# EAGLE board Circuit 2 using 555 Timer (EAGLE 5.06)
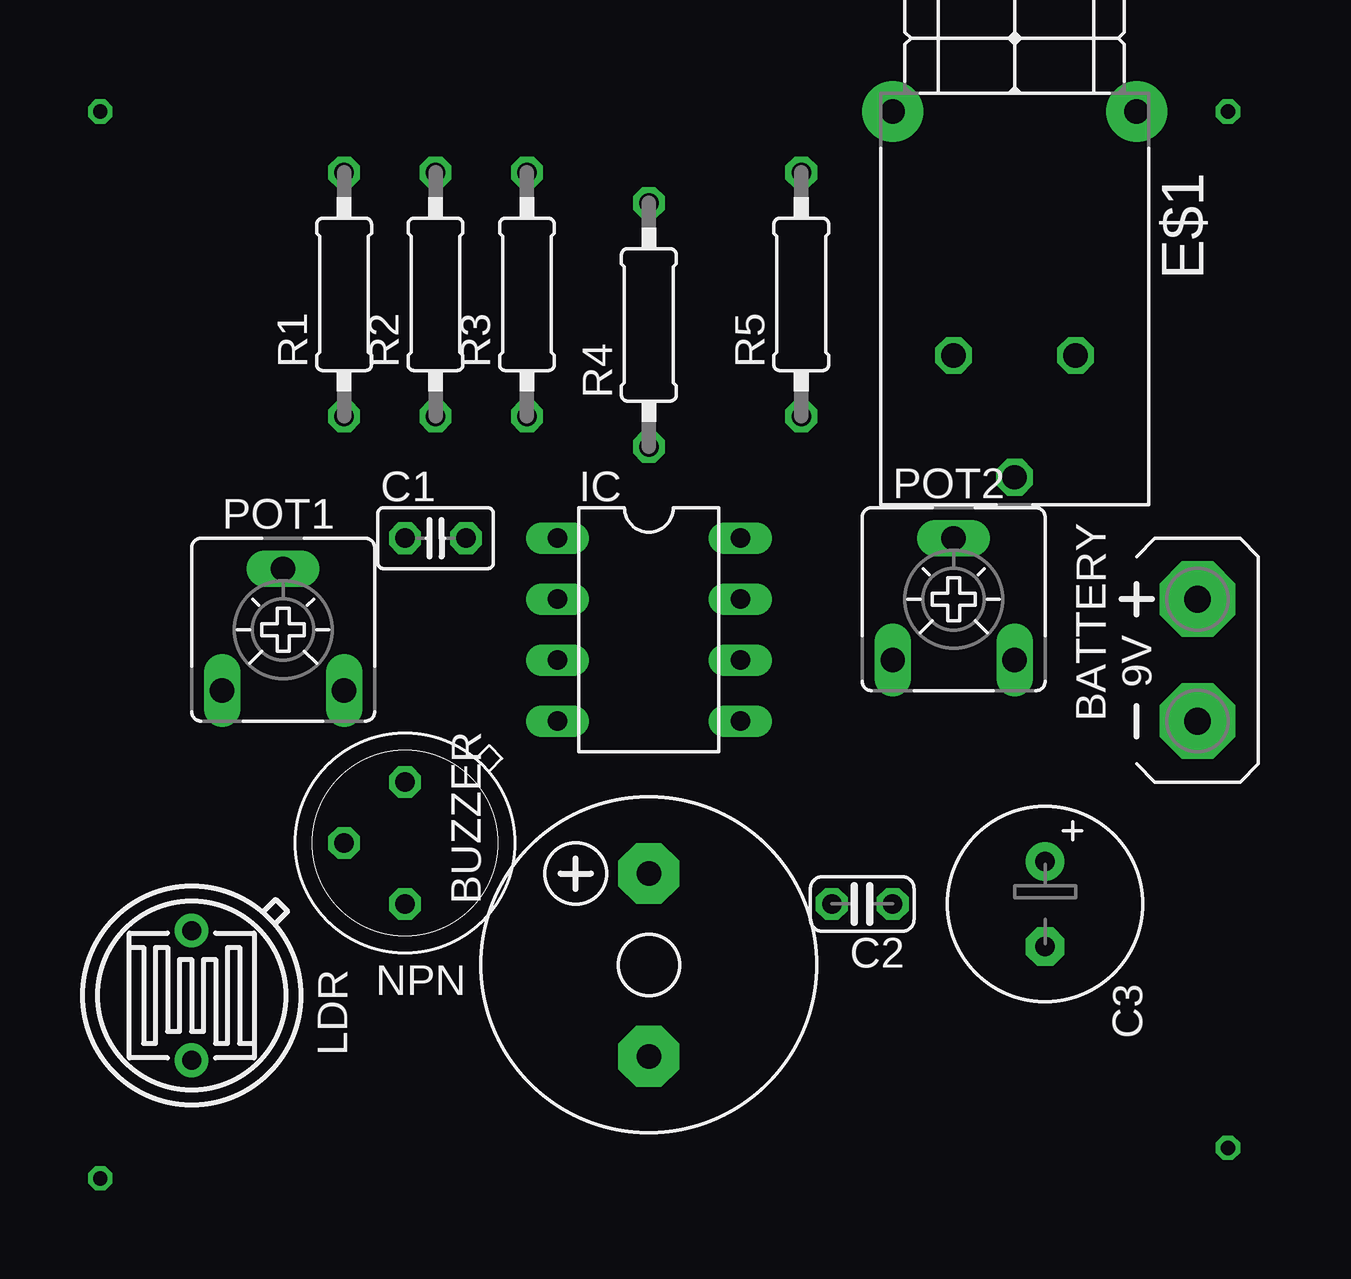
[diagram p0: board, top side]
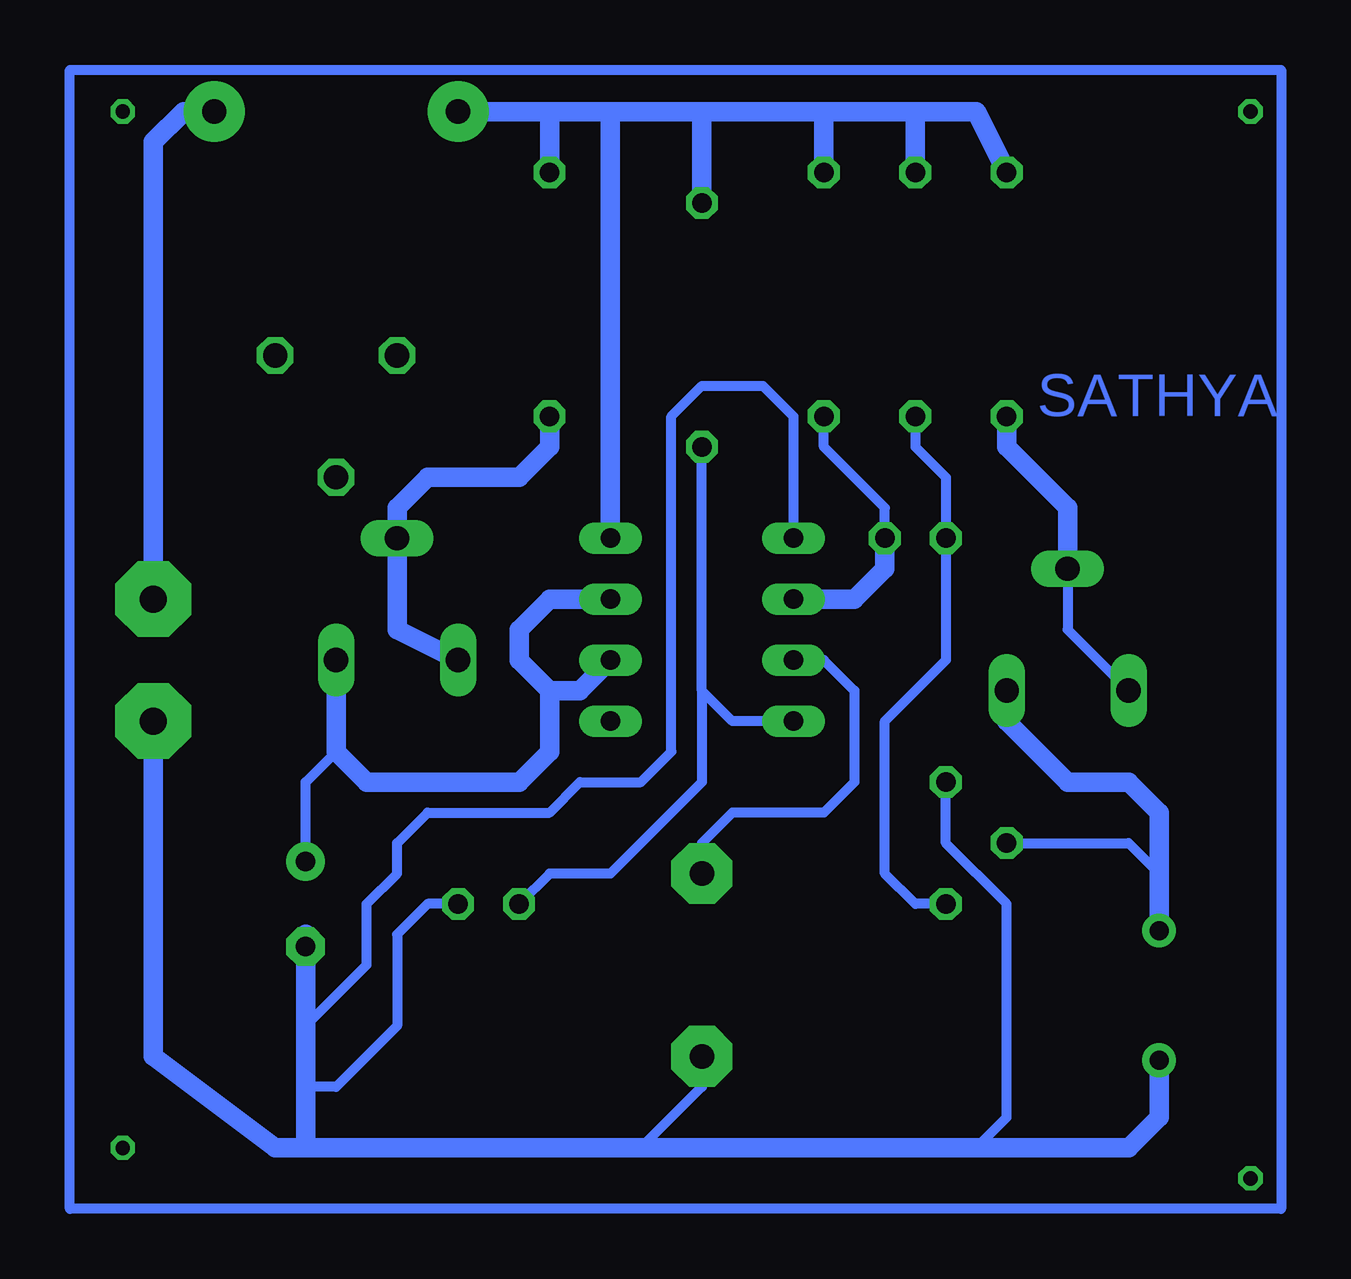
[diagram p1: board, bottom side, seen from below]

No outline drawn. Coordinates in mm, seen from the top.
Copper layers (1*16): Top 0.035mm / dielectric 1.5mm / Bottom 0.035mm
Design rules "default": minimum track width 10mil, minimum drill 24mil, track to track 8mil, track to pad 8mil, pad to pad 8mil, via to via 8mil, smd to smd 8mil, copper to edge 40mil, drill to drill 8mil, minimum pad ring 10mil, minimum via ring 8mil, stop-mask expansion 4mil, vias tented up to drill 0mil, thermal gap 10mil

## Footprints (pad centres in the part's own frame; a part is rotated, then mirrored left to right if it is on the bottom)
AB9V = drill 1.118 pad 3.15 octagon: + 0,2.54; - 0,-2.54
F/CM12P = drill 1.016 pad 2.54 octagon: + 3.81,0; - -3.81,0
C025-025X050 = drill 0.813 octagon: 1 -1.27,0; 2 1.27,0
C025-024X044 = drill 0.813 octagon: 1 -1.27,0; 2 1.27,0
E3,5-8 = drill 0.813 pad 1.6 round: + -1.778,0 | drill 0.813 pad 1.6 octagon: - 1.778,0
316-917 = drill 1.016 octagon: 1 10.16,2.54; 2 15.24,0; 3 10.16,-2.54 | drill 1.016 pad 2.54 round: B 0,-5.08; B1 0,5.08
DIL08 = drill 0.813 long: 1 -3.81,-3.81; 2 -1.27,-3.81; 3 1.27,-3.81; 4 3.81,-3.81; 5 3.81,3.81; 6 1.27,3.81; 7 -1.27,3.81; 8 -3.81,3.81
TO-5_V10 = drill 0.8 pad 1.4 round: 1 -2.7,0; 2 2.7,0
TO5 = drill 0.813 octagon: 1 0,-2.54; 2 2.54,0; 3 0,2.54
CA6V = drill 1.016 long: A -2.54,-2.54; E 2.54,-2.54; S 0,2.54
0207/10 = drill 0.813 octagon: 1 -5.08,0; 2 5.08,0

## Placement (x,y rotation side)
BATTERY  [AB9V]  68.58,24.13 0 top
BUZZER  [F/CM12P]  45.72,11.43 90 top
C1  0.1uF  [C025-025X050]  36.83,29.21 0 top
C2  0.01uF  [C025-024X044]  54.61,13.97 180 top
C3  10uF  [E3,5-8]  62.23,13.97 270 top
E$1  [316-917]  60.96,46.99 270 top
IC  555  [DIL08]  45.72,25.4 270 top
LDR  [TO-5_V10]  26.67,10.16 90 top
NPN  [TO5]  35.56,16.51 180 top
POT1  100K  [CA6V]  30.48,25.4 0 top
POT2  1M  [CA6V]  58.42,26.67 0 top
R1  10k  [0207/10]  33.02,39.37 90 top
R2  1M  [0207/10]  36.83,39.37 90 top
R3  1M  [0207/10]  40.64,39.37 90 top
R4  1M  [0207/10]  45.72,38.1 90 top
R5  47K  [0207/10]  52.07,39.37 90 top

## Library data of the parts
BATTERY = battery
BUZZER = buzzer
C1-C3 R1-R5 = rcl
E$1 = switch
IC = ic-package
LDR = photo-elements
NPN = transistor
POT1 POT2 = pot

## Nets
POT2: POT2.A POT2.S R5.1
S$2: E$1.B IC.8 R1.2 R2.2 R3.2 R4.2 R5.2
S$3: BUZZER.+ IC.3
S$4: BATTERY.+ E$1.B1
S$6: C1.1 NPN.3 R2.1
S$8: POT1.A POT1.S R1.1
S$9: C2.2 IC.4 R4.1
S$11: C1.2 IC.2 R3.1
S$12: IC.6 IC.7 POT2.E
S$16: NPN.2 POT1.E
S$17: BATTERY.- BUZZER.- C2.1 IC.1 NPN.1

## Tracks (layer width: path | path; a pad name or v marks a point on that pad's centre or on a via)
POT2
  Bottom 0.813: 58.42,27.94 58.42,25.4 POT2.A | 58.42,27.94 POT2.S | R5.1 52.07,33.02 53.34,31.75 57.15,31.75 58.42,30.48 58.42,27.94
S$1
  Bottom 0.406: 21.59,1.27 72.06,1.27 72.06,48.73 21.59,48.73 21.59,1.27
S$2
  Bottom 0.813: 49.53,46.99 IC.8 | 45.72,46.99 49.53,46.99 | 45.72,46.99 R4.2 | 40.64,46.99 45.72,46.99 | 40.64,46.99 R3.2 | 36.83,46.99 40.64,46.99 | 36.83,46.99 R2.2 | 36.83,46.99 34.29,46.99 R1.2 | 49.53,46.99 52.07,46.99 | 52.07,46.99 R5.2 | 52.07,46.99 E$1.B
S$3
  Bottom 0.406: IC.3 40.64,24.13 39.37,22.86 39.37,19.05 40.64,17.78 44.45,17.78 45.72,16.51 BUZZER.+
S$4
  Bottom 0.813: E$1.B1 67.31,46.99 68.58,45.72 BATTERY.+
S$5  (via drill 0.6)
  other vias: 22.86,46.99
S$6
  Bottom 0.406: R2.1 36.83,33.02 35.56,31.75 C1.1 35.56,24.13 38.1,21.59 38.1,15.24 36.83,13.97 NPN.3
S$7  (via drill 0.6)
  other vias: 22.86,2.54
S$8
  Bottom 0.406: POT1.S 30.48,25.4 POT1.A
  Bottom 0.813: R1.1 33.02,33.02 30.48,30.48 POT1.S
S$9
  Bottom 0.406: 45.72,22.86 R4.1 | 45.72,22.86 44.45,21.59 IC.4 | 45.72,22.86 45.72,19.05 49.53,15.24 52.07,15.24 C2.2
S$10  (via drill 0.6)
  other vias: 69.85,46.99
S$11
  Bottom 0.406: R3.1 40.64,33.02 38.1,30.48 C1.2
  Bottom 0.813: IC.2 39.37,26.67 38.1,27.94 C1.2
S$12
  Bottom 0.406: 62.23,15.24 62.23,19.05 60.96,20.32
  Bottom 0.813: POT2.E 60.96,20.32 59.69,19.05 53.34,19.05 52.07,20.32 52.07,22.86 | IC.7 52.07,26.67 53.34,25.4 53.34,24.13 52.07,22.86 | 52.07,22.86 50.8,22.86 IC.6
S$13  (via drill 0.6)
  other vias: 69.85,3.81
S$16
  Bottom 0.406: 33.02,21.59 POT1.E | NPN.2 27.94,16.51 26.67,15.24
  Bottom 0.813: 33.02,21.59 30.48,19.05 27.94,19.05 26.67,17.78 26.67,15.24 26.67,12.7
S$17
  Bottom 0.406: C2.1 57.15,13.97 58.42,12.7 58.42,8.89 60.96,6.35 62.23,6.35 | IC.1 41.91,34.29 43.18,35.56 45.72,35.56 46.99,34.29 46.99,20.32 48.26,19.05 50.8,19.05 52.07,17.78 57.15,17.78 58.42,16.51 58.42,15.24 59.69,13.97 59.69,11.43 62.23,8.89 | NPN.1 35.56,16.51 33.02,13.97 33.02,5.08 34.29,3.81 | BUZZER.- 45.72,6.35 48.26,3.81
  Bottom 0.813: BATTERY.- 68.58,7.62 63.5,3.81 62.23,3.81 | 62.23,12.7 62.23,8.89 62.23,6.35 62.23,3.81 | 62.23,3.81 48.26,3.81 34.29,3.81 27.94,3.81 26.67,5.08 26.67,7.62

## Text on the board
Bottom: SATHYA